# Altium PCB PCB_TPM_Module_TalosII_Rev_1.1_2022-10-21.pcbdoc
Units mil, origin at the board's own origin, x right, y up, seen from the top; angles counter-clockwise.
Board outline 2065 x 2360 mil, 2 copper layers (Top Layer, Bottom Layer); 9 components, 37 nets, 58 pads, 2 vias.
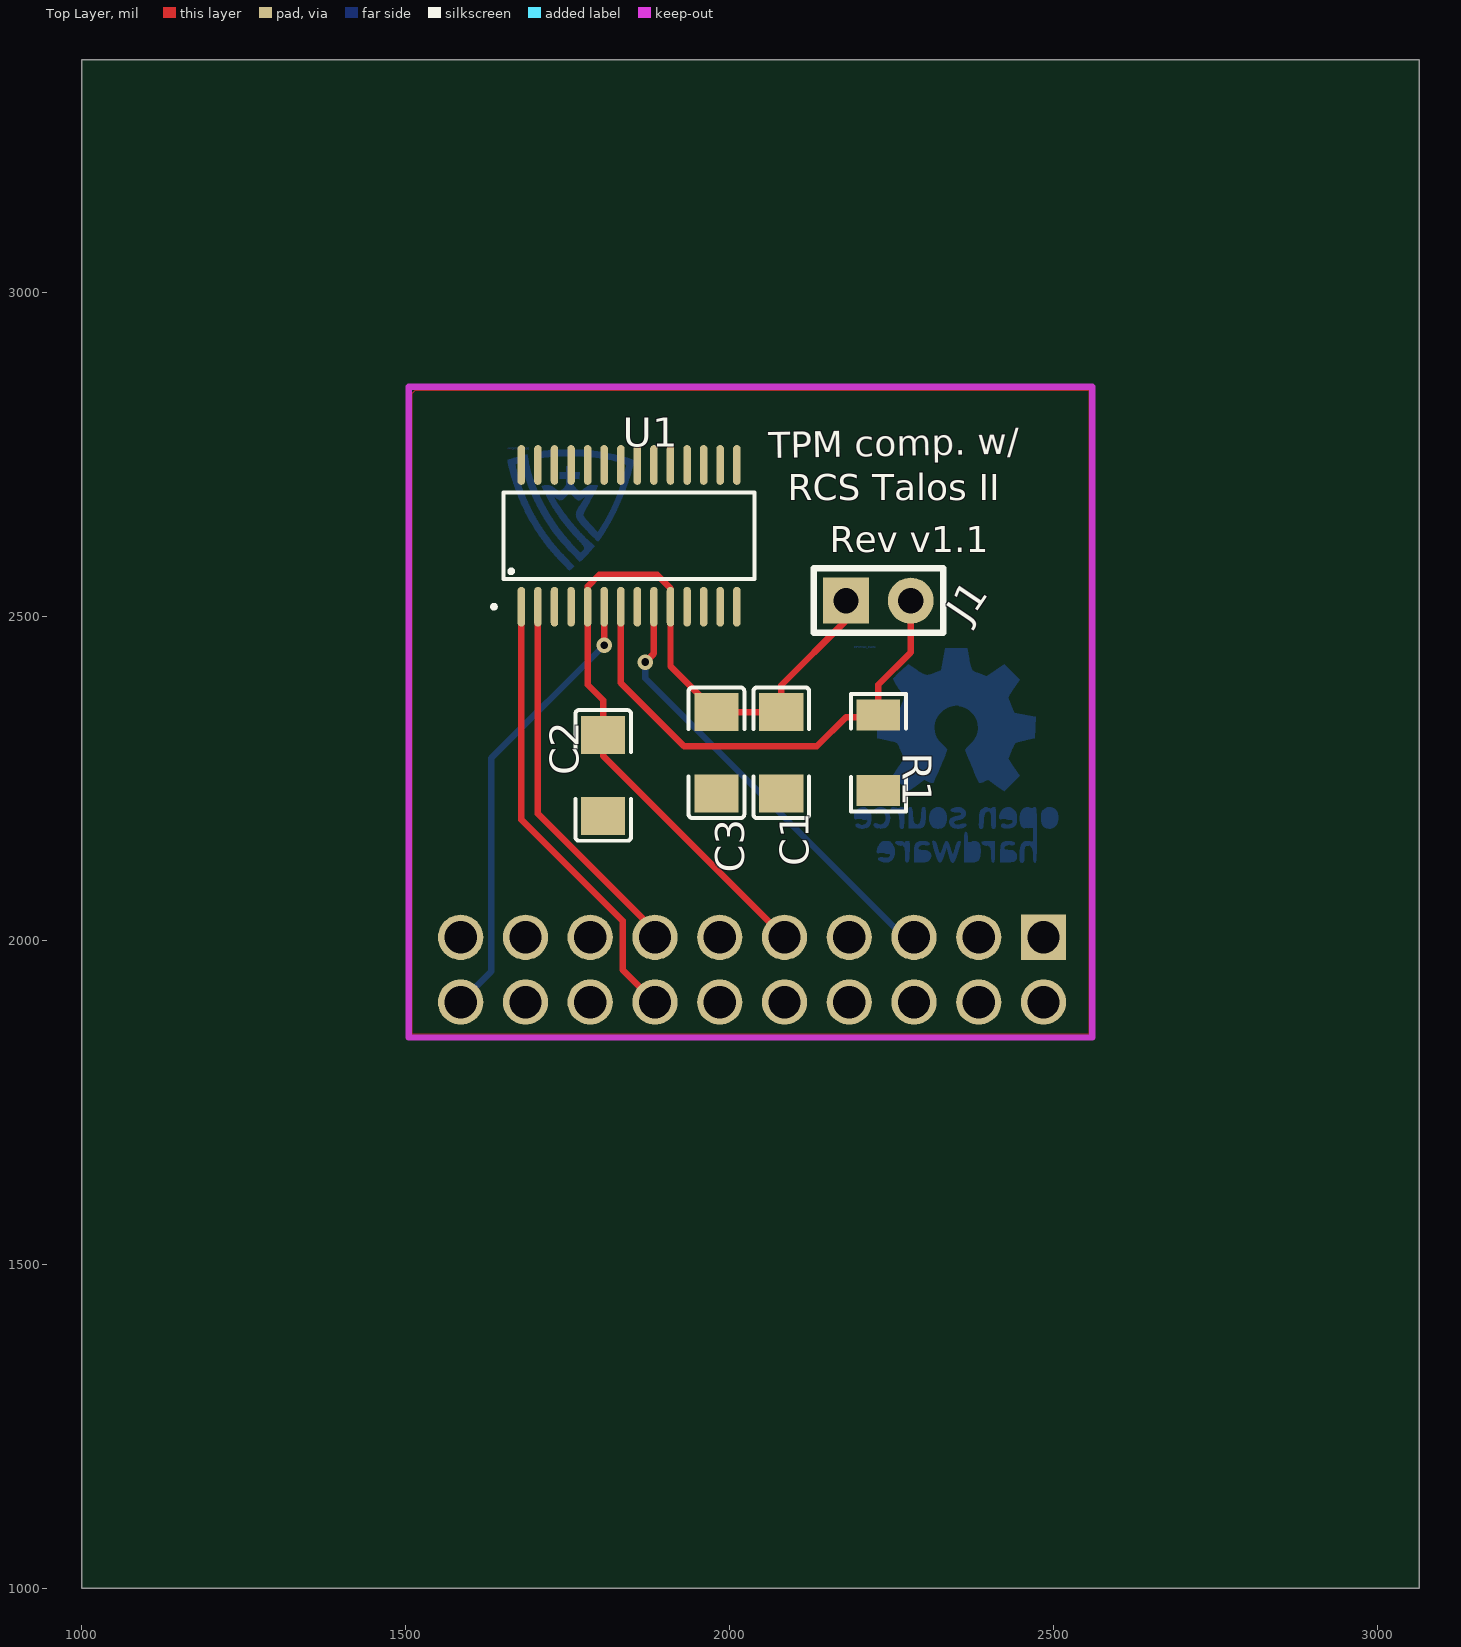
[diagram p0: Top Layer view]
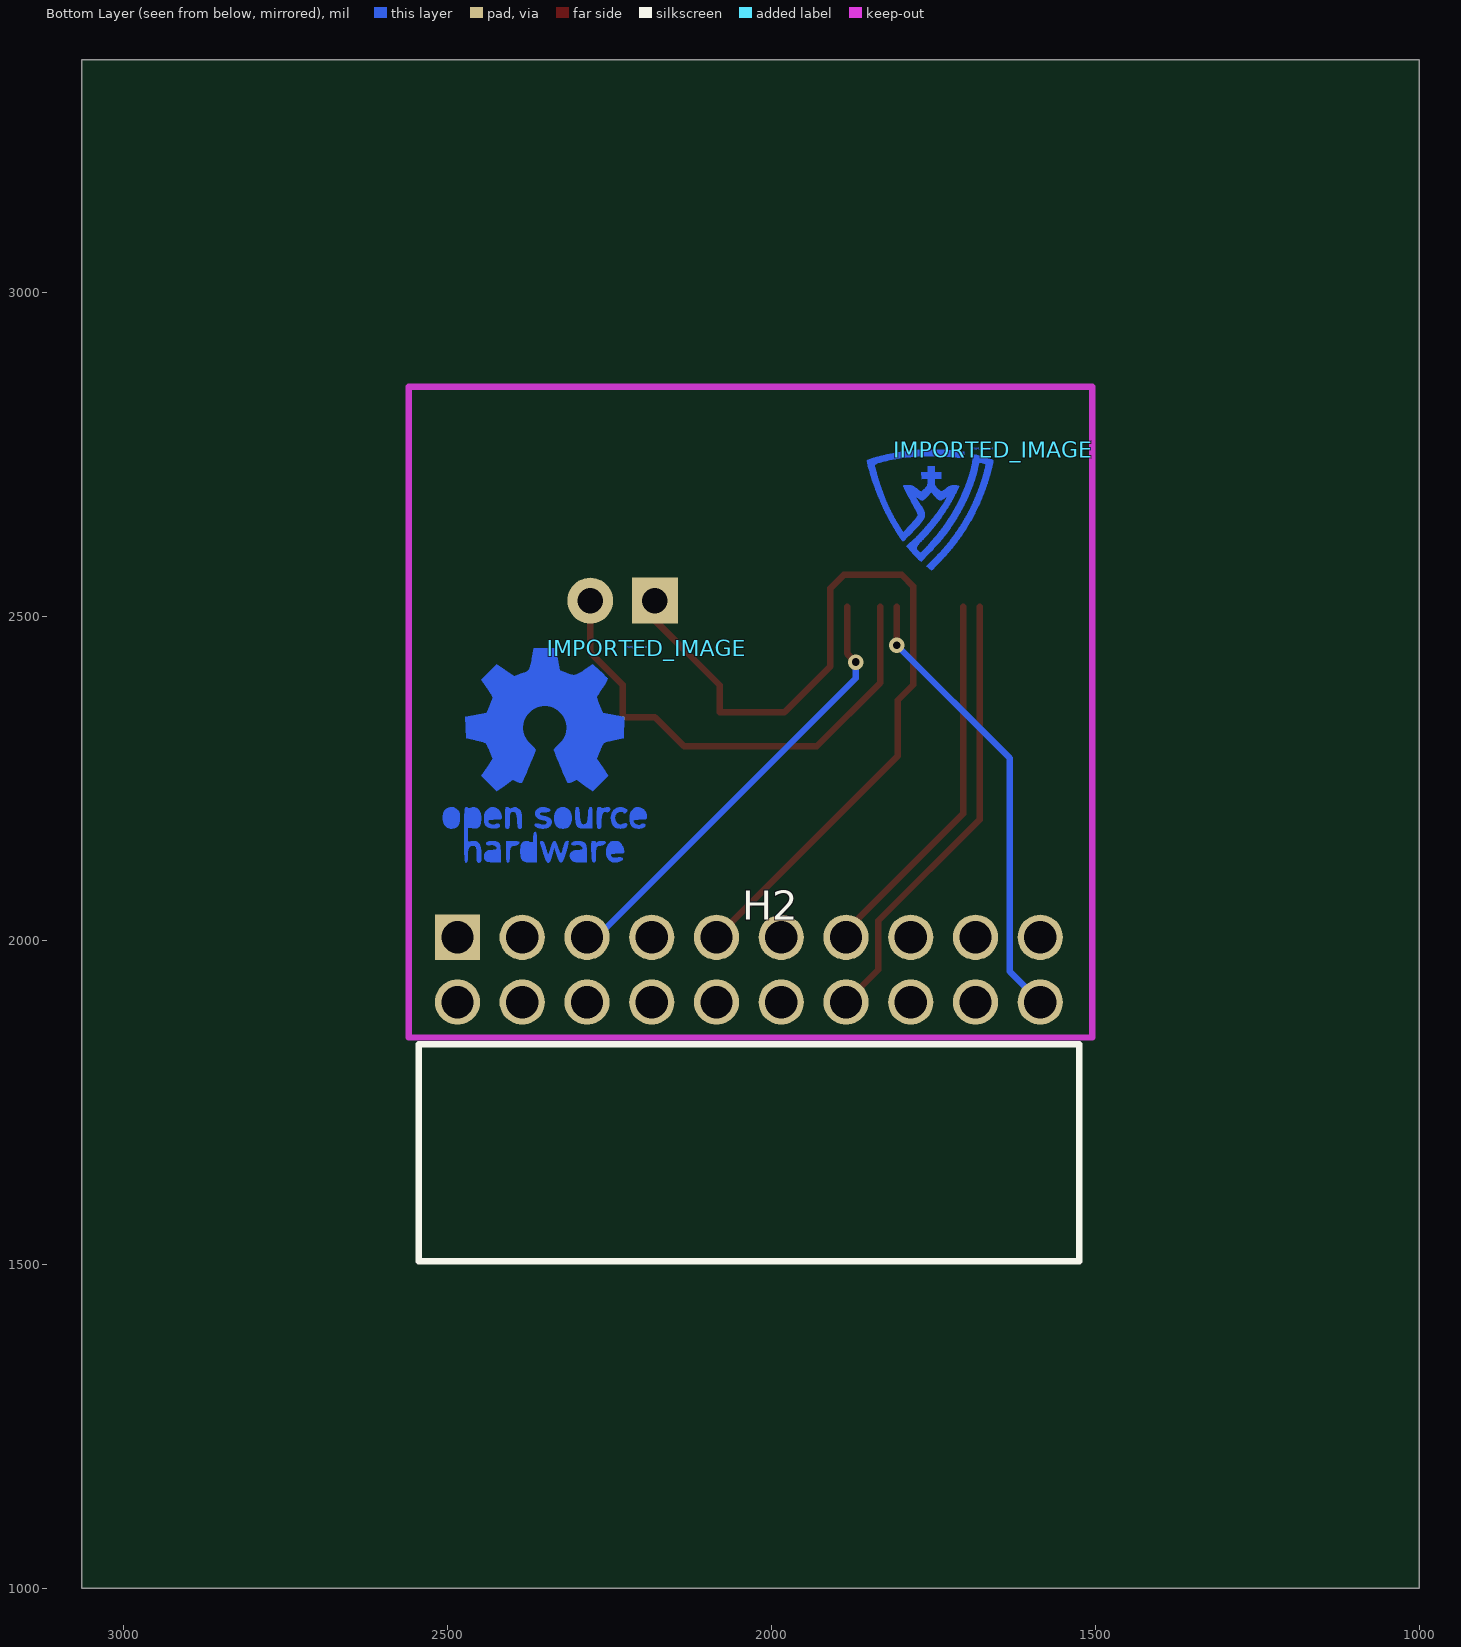
[diagram p1: Bottom Layer view, seen from below]

## Layer stack, top to bottom
Top Layer: signal copper (thickness not stored)
Dielectric: dielectric 12.6, FR-4, Dk 4.8
Bottom Layer: signal copper (thickness not stored)

## Board outline
3065,1000 1000,1000 1000,3360 3065,3360

## Components (designator, comment, footprint, x,y, rotation, side; value= is the part's Value field where it differs from the comment)
C1 "1uF" C1206 2080,2290 r90 top
C2 "100nF" C1206 1805,2255 r90 top
C3 "100nF" C1206 1980,2290 r90 top
H2 "220R-2*10P H=8.5MM Ytype Gold-plated black" HDR-TH_20P-P2.54-H-F-R2-C10-S2.54-W10.2 2035,1955 r0 bottom
IMPORTED_IMAGE "IMPORTED_IMAGE" IMPORTED_IMAGE#1 2192.7,2451.18 r0 bottom
IMPORTED_IMAGE "IMPORTED_IMAGE" IMPORTED_IMAGE#2 1657.51,2758.15 r0 bottom
J1 "JUMPER2" HDR-TH_2P-P2.54-V-M-1 2230,2525 r0 top
R1 "4.7kΩ" R1206 2230,2290 r270 top
U1 "SLB9645TT12FW13333XUMA2" PG-TSSOP-28_L9.7-W4.4-P0.65-LS6.4-BL 1845,2625 r0 top

## Footprints (in the part's own frame and the unit in brackets; to place one, negate y for a bottom-side part, rotate by r counter-clockwise, add the part's x,y. Pads: shape width x height; smd on the part's side, far side on the other; paste and mask are expansions set on the pad)
C1206 [mm]
  rect 1.485x1.728 smd: 1(-1.593,0) 2(1.593,0)
  silkscreen extent -2.56,-1.09 2.56,1.09
HDR-TH_2P-P2.54-V-M-1 [mm]
  rect 1.8x1.8 hole 1: 1(-1.27,0)
  round 1.8 hole 1: 2(1.27,0)
  silkscreen extent -2.54,-1.27 2.54,1.27
HDR-TH_20P-P2.54-H-F-R2-C10-S2.54-W10.2 [mil]
  rect 70x70 hole 50: 1(450,-50)
  round 70 hole 50: 2(450,50) 3(350,-50) 4(350,50) 5(250,-50) 6(250,50) 7(150,-50) 8(150,50) 9(50,-50) 10(50,50) 11(-50,-50) 12(-50,50) 13(-150,-50) 14(-150,50) 15(-250,-50) 16(-250,50) 17(-350,-50) 18(-350,50) 19(-450,-50) 20(-450,50)
  silkscreen extent -510,115 510,450
IMPORTED_IMAGE#1 [mil]
  Top Layer region: 342 vertices and 0 holes, not listed, extent 120.8,297.41 164.48,330.87
  Top Layer region: 346 vertices and 1 holes, not listed, extent 255.47,244.97 281.71,330.71
  Top Layer region: 214.35,330.71 213.64,330.59 213.07,330.2 212.61,329.5 212.26,328.43 212.01,326.97 211.84,325.05 211.75,322.64 211.72,319.68 211.72,318.61 211.7,317.58 211.67,316.59 211.63,315.65 211.58,314.76 211.51,313.91 211.43,313.11 211.34,312.34 211.23,311.62 211.11,310.94 210.97,310.3 210.82,309.7 210.65,309.14 210.46,308.61 210.26,308.12 210.04,307.66 209.8,307.24 209.54,306.85 209.26,306.5 208.97,306.18 208.65,305.88 208.31,305.62 207.95,305.39 207.58,305.19 207.17,305.01 206.75,304.86 206.3,304.73 205.83,304.63 205.34,304.56 204.82,304.5 204.28,304.47 203.71,304.46 202.93,304.41 202.15,304.27 201.38,304.05 200.62,303.76 199.9,303.41 199.22,303 198.6,302.56 198.04,302.1 197.56,301.61 197.17,301.12 196.88,300.62 196.7,300.15 196.64,299.69 196.72,299.28 196.94,298.9 197.32,298.59 197.81,298.4 198.63,298.24 199.73,298.1 201.06,297.98 202.59,297.9 204.27,297.85 206.06,297.83 207.91,297.85 216.97,298.06 216.97,314.38 216.97,316.19 216.96,317.87 216.94,319.42 216.91,320.85 216.88,322.15 216.83,323.35 216.8,324.08 216.75,324.77 216.71,325.41 216.66,326.01 216.6,326.57 216.53,327.08 216.46,327.55 216.39,327.98 216.31,328.38 216.22,328.74 216.12,329.06 216.02,329.35 215.91,329.61 215.73,329.94 215.53,330.2 215.31,330.41 215.08,330.55 214.82,330.65 214.54,330.7
  Top Layer region: 232 vertices and 1 holes, not listed, extent 35,297.63 62.89,330.56
  Top Layer region: 80.91,330.47 80.21,330.32 79.67,329.85 79.28,329.01 79.01,327.72 78.85,325.91 78.76,323.52 78.74,320.48 78.74,319.24 78.73,318.06 78.71,316.94 78.68,315.88 78.65,314.89 78.6,313.95 78.55,313.06 78.48,312.24 78.41,311.46 78.32,310.73 78.21,310.06 78.1,309.43 77.96,308.85 77.82,308.31 77.65,307.82 77.48,307.37 77.28,306.95 77.06,306.58 76.83,306.24 76.58,305.94 76.3,305.67 76.01,305.44 75.69,305.23 75.36,305.05 75,304.9 74.61,304.77 74.2,304.67 73.77,304.59 73.31,304.53 72.82,304.49 72.31,304.47 71.77,304.46 70.85,304.42 69.95,304.3 69.07,304.1 68.22,303.85 67.41,303.53 66.65,303.17 65.96,302.77 65.34,302.34 64.8,301.88 64.35,301.4 64.01,300.91 63.77,300.43 63.66,299.94 63.69,299.48 63.85,299.03 64.17,298.61 64.61,298.28 65.17,298.01 65.85,297.8 66.62,297.64 67.47,297.53 68.37,297.48 69.32,297.48 70.29,297.53 71.26,297.63 72.22,297.77 73.14,297.96 74.02,298.2 74.82,298.48 75.54,298.8 76.15,299.16 76.64,299.56 77.2,300.1 77.66,300.48 78.02,300.71 78.3,300.79 78.51,300.71 78.64,300.48 78.72,300.1 78.74,299.56 79.02,298.75 79.79,298.08 80.92,297.63 82.3,297.46 82.9,297.48 83.42,297.53 83.88,297.65 84.27,297.84 84.6,298.14 84.88,298.55 85.1,299.11 85.28,299.82 85.41,300.71 85.49,301.81 85.55,303.12 85.56,304.66 85.55,306.47 85.51,308.55 85.45,310.93 85.37,313.63 85.31,315.49 85.24,317.21 85.17,318.79 85.1,320.24 85.05,321.14 85,321.98 84.94,322.77 84.88,323.51 84.81,324.2 84.74,324.85 84.66,325.44 84.58,326 84.49,326.51 84.4,326.98 84.3,327.41 84.2,327.81 84.08,328.16 83.96,328.49 83.83,328.78 83.7,329.05 83.55,329.28 83.4,329.49 83.24,329.67 83.06,329.83 82.78,330.02 82.48,330.18 82.16,330.29 81.8,330.38
  Top Layer region: 179 vertices and 1 holes, not listed, extent 92.74,297.58 118.79,330.37
  Top Layer region: 163 vertices and 1 holes, not listed, extent 225.72,297.52 251.28,330.32
  Top Layer region: 140 vertices and 1 holes, not listed, extent 169.73,283.46 195.1,330.23
  Top Layer region: 129 vertices and 1 holes, not listed, extent 115.82,245.2 142.93,278.22
  Top Layer region: 161 vertices and 1 holes, not listed, extent 288.71,245.21 314.96,278.22
  Top Layer region: 247 vertices and 1 holes, not listed, extent 0,245.31 26.25,278.22
  Top Layer region: 229 vertices and 0 holes, not listed, extent 192.65,244.97 218.72,278.22
  Top Layer region: 169 vertices and 0 holes, not listed, extent 56.6,244.97 76.99,278.22
  Top Layer region: 280 vertices and 0 holes, not listed, extent 146.73,245.11 173.08,278.21
  Top Layer region: 197 vertices and 0 holes, not listed, extent 29.93,245.18 55.33,278.16
  Top Layer region: 209 vertices and 1 holes, not listed, extent 223.97,245.13 251.09,278.01
  Top Layer region: 207 vertices and 0 holes, not listed, extent 83.99,245.21 110.24,277.99
  Top Layer region: 665 vertices and 0 holes, not listed, extent 34.87,0 280.09,220.59
IMPORTED_IMAGE#2 [mil]
  Top Layer region: 1646 vertices and 0 holes, not listed, extent -0.19,-0.04 195.16,186.34
PG-TSSOP-28_L9.7-W4.4-P0.65-LS6.4-BL [mm]
  oval 0.294x1.56 smd: 1(-4.225,-2.78) 2(-3.575,-2.78) 3(-2.925,-2.78) 4(-2.275,-2.78) 5(-1.625,-2.78) 6(-0.975,-2.78) 7(-0.325,-2.78) 8(0.325,-2.78) 9(0.975,-2.78) 10(1.625,-2.78) 11(2.275,-2.78) 12(2.925,-2.78) 13(3.575,-2.78) 14(4.225,-2.78) 15(4.225,2.78) 16(3.575,2.78) 17(2.925,2.78) 18(2.275,2.78) 19(1.625,2.78) 20(0.975,2.78) 21(0.325,2.78) 22(-0.325,2.78) 23(-0.975,2.78) 24(-1.625,2.78) 25(-2.275,2.78) 26(-2.925,2.78) 27(-3.575,2.78) 28(-4.225,2.78)
  silkscreen extent -5.37,-2.85 4.93,1.7
R1206 [mil]
  rect 47.54x66.97 smd: 1(-58.22,0) 2(58.22,0)
  silkscreen extent -91,-42 91,42

## Via types
v1: diameter 24.02, hole 12.01, Top Layer to Bottom Layer, tented both sides, 2 vias

## Nets (pads, with @x,y where several pads share a name; then routed paths per layer and width w, separated by ;. In a path a pad name is that pad's centre, name@x,y a point inside that pad or via, vN(x,y) a via of type N, cw(c..) or ccw(c..) an arc to the next point about the centre after c; other vN are vias at no path point)
DAVINT: H2.20 U1.6 | length 702.3
  Top Layer w10: v1(1806.61,2456.09) U1.6
  Bottom Layer w10: H2.20 1632.32,1952.32 1632.32,2281.8 v1(1806.61,2456.09)
GND: C1.1 C2.1 C3.1 H2.2 H2.12 H2.17 R1.2 U1.4 U1.11 U1.18 U1.25
H2_1: H2.1
H2_3: H2.3
H2_4: H2.4
H2_6: H2.6
H2_7: H2.7
H2_8: H2.8
H2_10: H2.10
H2_11: H2.11
H2_15: H2.15
H2_16: H2.16
H2_18: H2.18
H2_19: H2.19
R1_1: J1.2 R1.1 U1.7 | length 782.3
  Top Layer w10: U1.7 1832.2,2397.8 1930,2300 2135,2300 2180,2345 R1.1@2225,2345 ; R1.1 2230,2395 2280,2445 J1.2 J1.2@2265,2525
RESET: H2.5 U1.9 | length 696.8
  Top Layer w10: v1(1870,2430) 1883.39,2443.39 U1.9
  Bottom Layer w10: v1(1870,2430) 1870,2405 2270,2005 H2.5
S$25: 
SCL: H2.13 U1.2 | length 585.5
  Top Layer w10: U1.2 1704.2,2195.8 1885,2015 H2.13
SDA: H2.14 U1.1 | length 696
  Top Layer w10: U1.1 1678.66,2186.84 1835,2030.5 1835,1955 H2.14
U1_3: U1.3
U1_8: U1.8
U1_12: U1.12
U1_13: U1.13
U1_14: U1.14
U1_15: U1.15
U1_16: U1.16
U1_17: U1.17
U1_19: U1.19
U1_20: U1.20
U1_21: U1.21
U1_22: U1.22
U1_23: U1.23
U1_24: U1.24
U1_26: U1.26
U1_27: U1.27
U1_28: U1.28
VCC: C1.2 C2.2 C3.2 H2.9 J1.1 U1.5 U1.10 | length 1347.4
  Top Layer w10: U1.5 1781.02,2395.2 1805,2371.22 C2.2 1805,2285 H2.9 ; U1.5 1781,2546.9 1799.1,2565 1888.2,2565 1909,2544.2 U1.10 ; U1.10 1908.98,2423.72 C3.2 2077.7,2352.7 C1.2@2080,2355 ; C1.2 2080,2373.44 2080,2394.18 2180,2494.2 J1.1

## Polygon pours and split planes (outlines as drawn)
GND on Top Layer (solid): 2555,2850 2555,1855 1510,1855 1510,2845 1515,2850 2555,2850

## Silkscreen, mask and mechanical layers (free items; w line width, h text height)
Top Overlay:
  text "TPM comp. w/" at 2060.35,2744.69 h40.63 r1
  text "RCS Talos II" at 2090,2679.68 h40.63
  text "Rev v1.1" at 2155,2599.68 h40.63